# EAGLE board sonda5 (EAGLE 4.16)
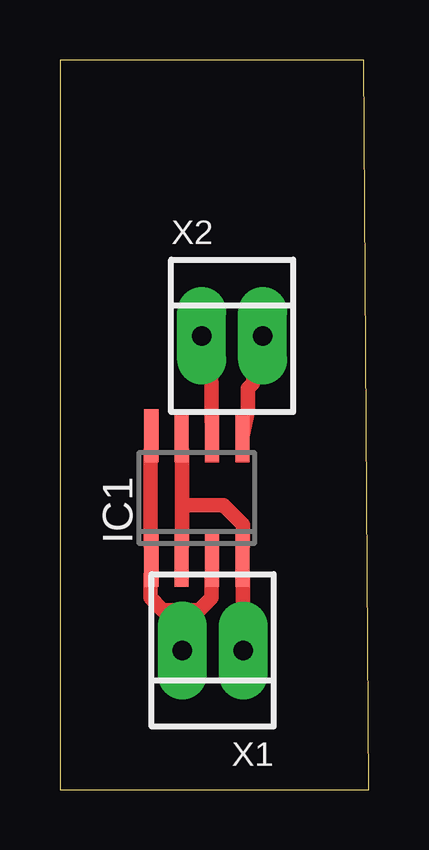
[diagram p0: board, top side]

Size 12.88 x 30.4 mm. Coordinates in mm from the lower left corner, seen from the top.
Outline: 0,0 12.88,0 12.68,30.4 0,30.4 0,0
Copper layers (1*16): Top 0.035mm / dielectric 1.5mm / Bottom 0.035mm
Design rules "mio2": minimum track width 24mil, minimum drill 24mil, track to track 24mil, track to pad 24mil, pad to pad 24mil, via to via 24mil, smd to smd 24mil, copper to edge 40mil, drill to drill 8mil, minimum pad ring 24mil, minimum via ring 24mil, stop-mask expansion 4mil, vias tented up to drill 0mil, thermal gap 10mil

## Footprints (pad centres in the part's own frame; a part is rotated, then mirrored left to right if it is on the bottom)
SO-08 = smd 0.6 x 2.2: 1 -1.905,-2.6; 2 -0.635,-2.6; 3 0.635,-2.6; 4 1.905,-2.6; 5 1.905,2.6; 6 0.635,2.6; 7 -0.635,2.6; 8 -1.905,2.6
22-23-2021 = drill 0.813 long: 1 -1.27,0; 2 1.27,0

## Placement (x,y rotation side)
IC1  24LC16BSN  [SO-08]  5.71,12.15 0 top
U$1  [A4P-LOC]  -16.79,-14.82 0 top  (outside the outline)
X1  22-23-2021  [22-23-2021]  6.37,5.8 180 top
X2  22-23-2021  [22-23-2021]  7.18,18.91 0 top

## Library data of the parts
IC1 = microchip
U$1 = frames
X1 X2 = con-molex

## Nets
GND: IC1.2 IC1.4 IC1.7 X1.1
N$1: IC1.6 X2.1
N$2: IC1.5 X2.2
VCC: IC1.1 IC1.3 IC1.8 X1.2

## Tracks (layer width: path | path; a pad name or v marks a point on that pad's centre or on a via)
GND
  Top 0.61: 5.1,11.85 5.1,13.68 IC1.7 | 5.1,11.85 5.1,10.63 IC1.2 | X1.1 7.64,8.5 IC1.4 7.64,10.63 7.64,11.04 6.83,11.85 5.1,11.85
N$1
  Top 0.61: IC1.6 6.32,15.81 6.32,16.93 X2.1
N$2
  Top 0.61: IC1.5 7.84,15.81 7.84,16.73 8.05,16.93 X2.2
VCC
  Top 0.61: IC1.8 3.78,13.68 3.78,10.63 IC1.1 3.78,8.5 3.78,7.99 4.29,7.48 5.1,7.48 | 5.1,7.48 5.81,7.48 6.32,7.99 6.32,8.5 IC1.3 | X1.2 5.1,7.48